# Altium PCB XT short bus ( 5.2 X 4.2 inches).PCBDOC
Units mil, origin at the board's own origin, x right, y up, seen from the top; angles counter-clockwise.
Board outline 5200 x 4200 mil, 10 copper layers (TopLayer, MidLayer1, MidLayer2, MidLayer3, MidLayer4, MidLayer5, MidLayer6, MidLayer7, MidLayer8, BottomLayer); 1 components, 0 nets, 65 pads, 0 vias.
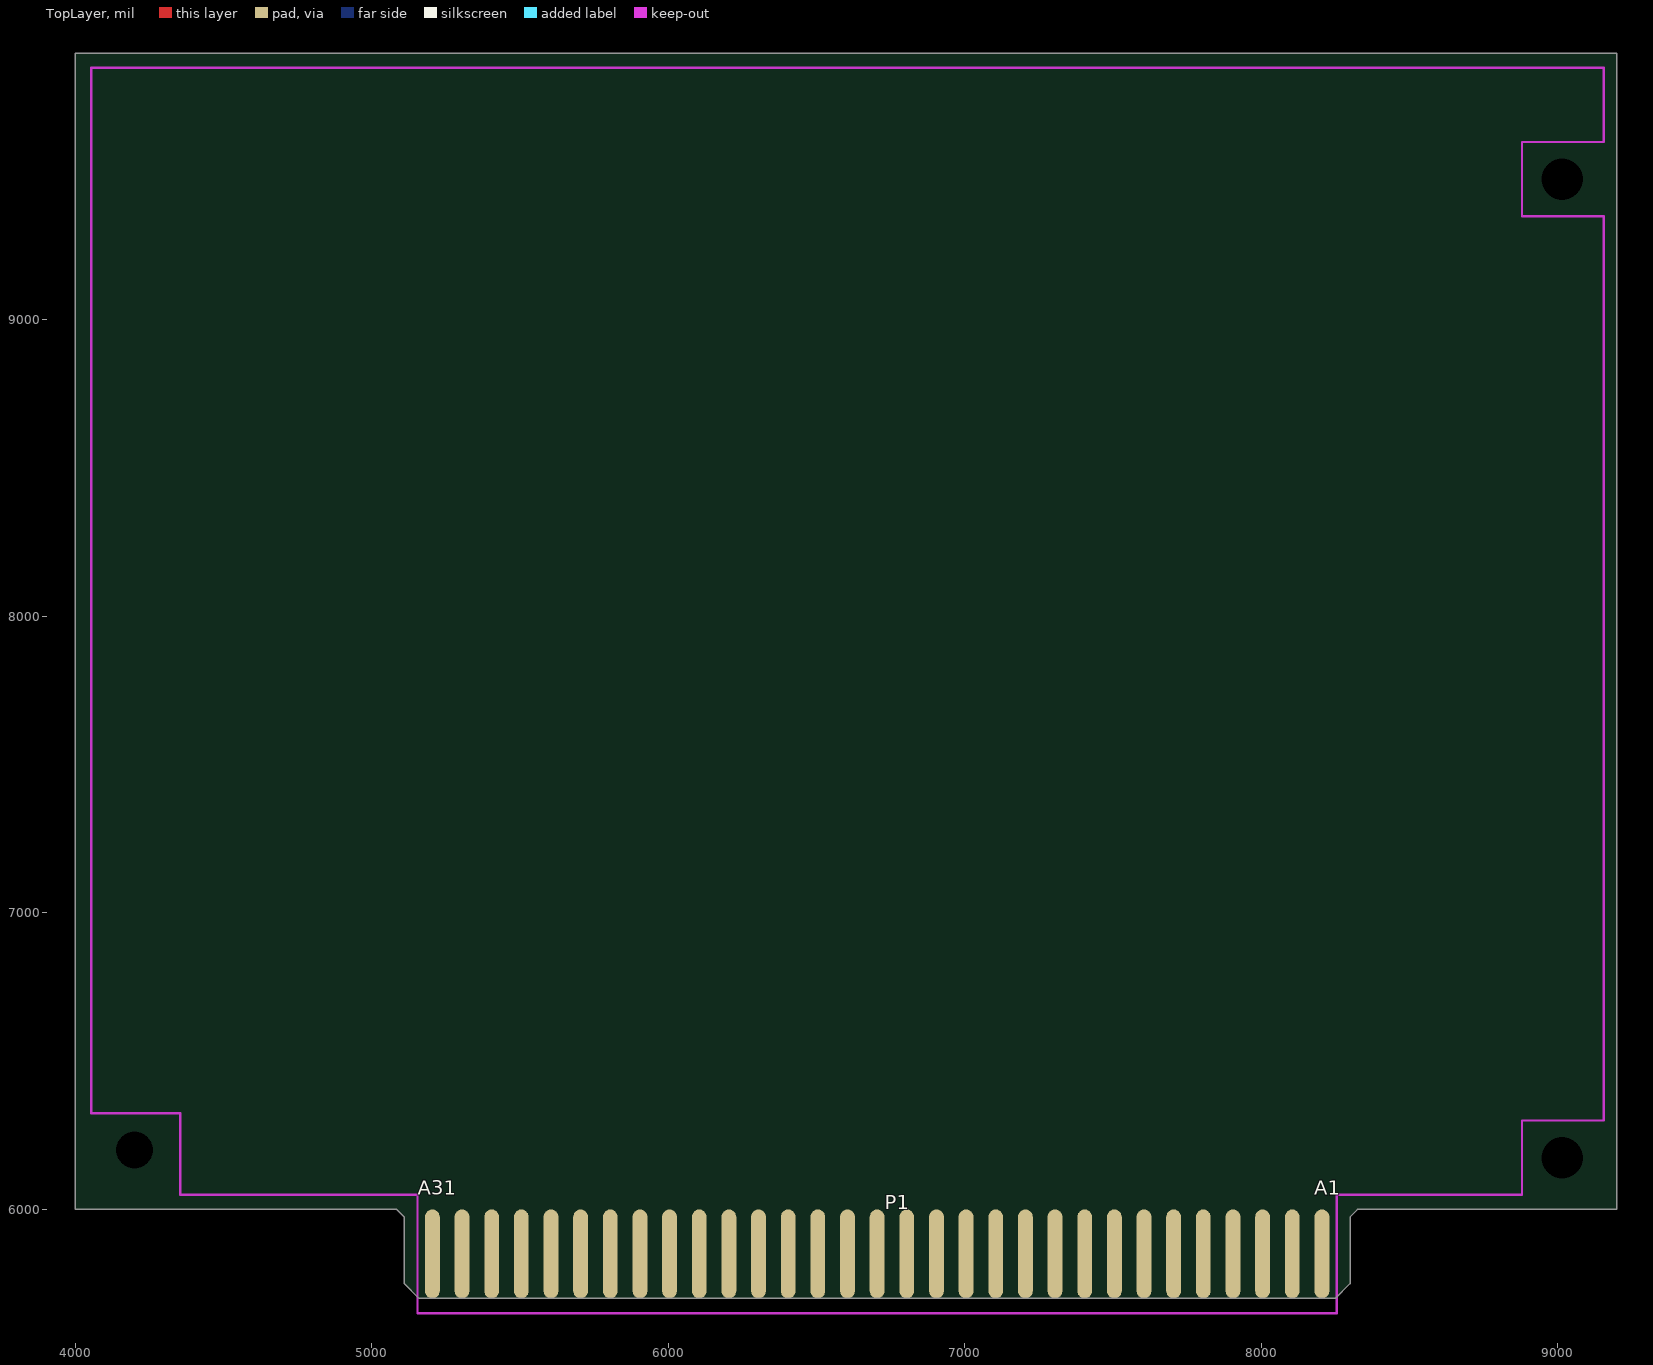
[diagram p0: TopLayer view]
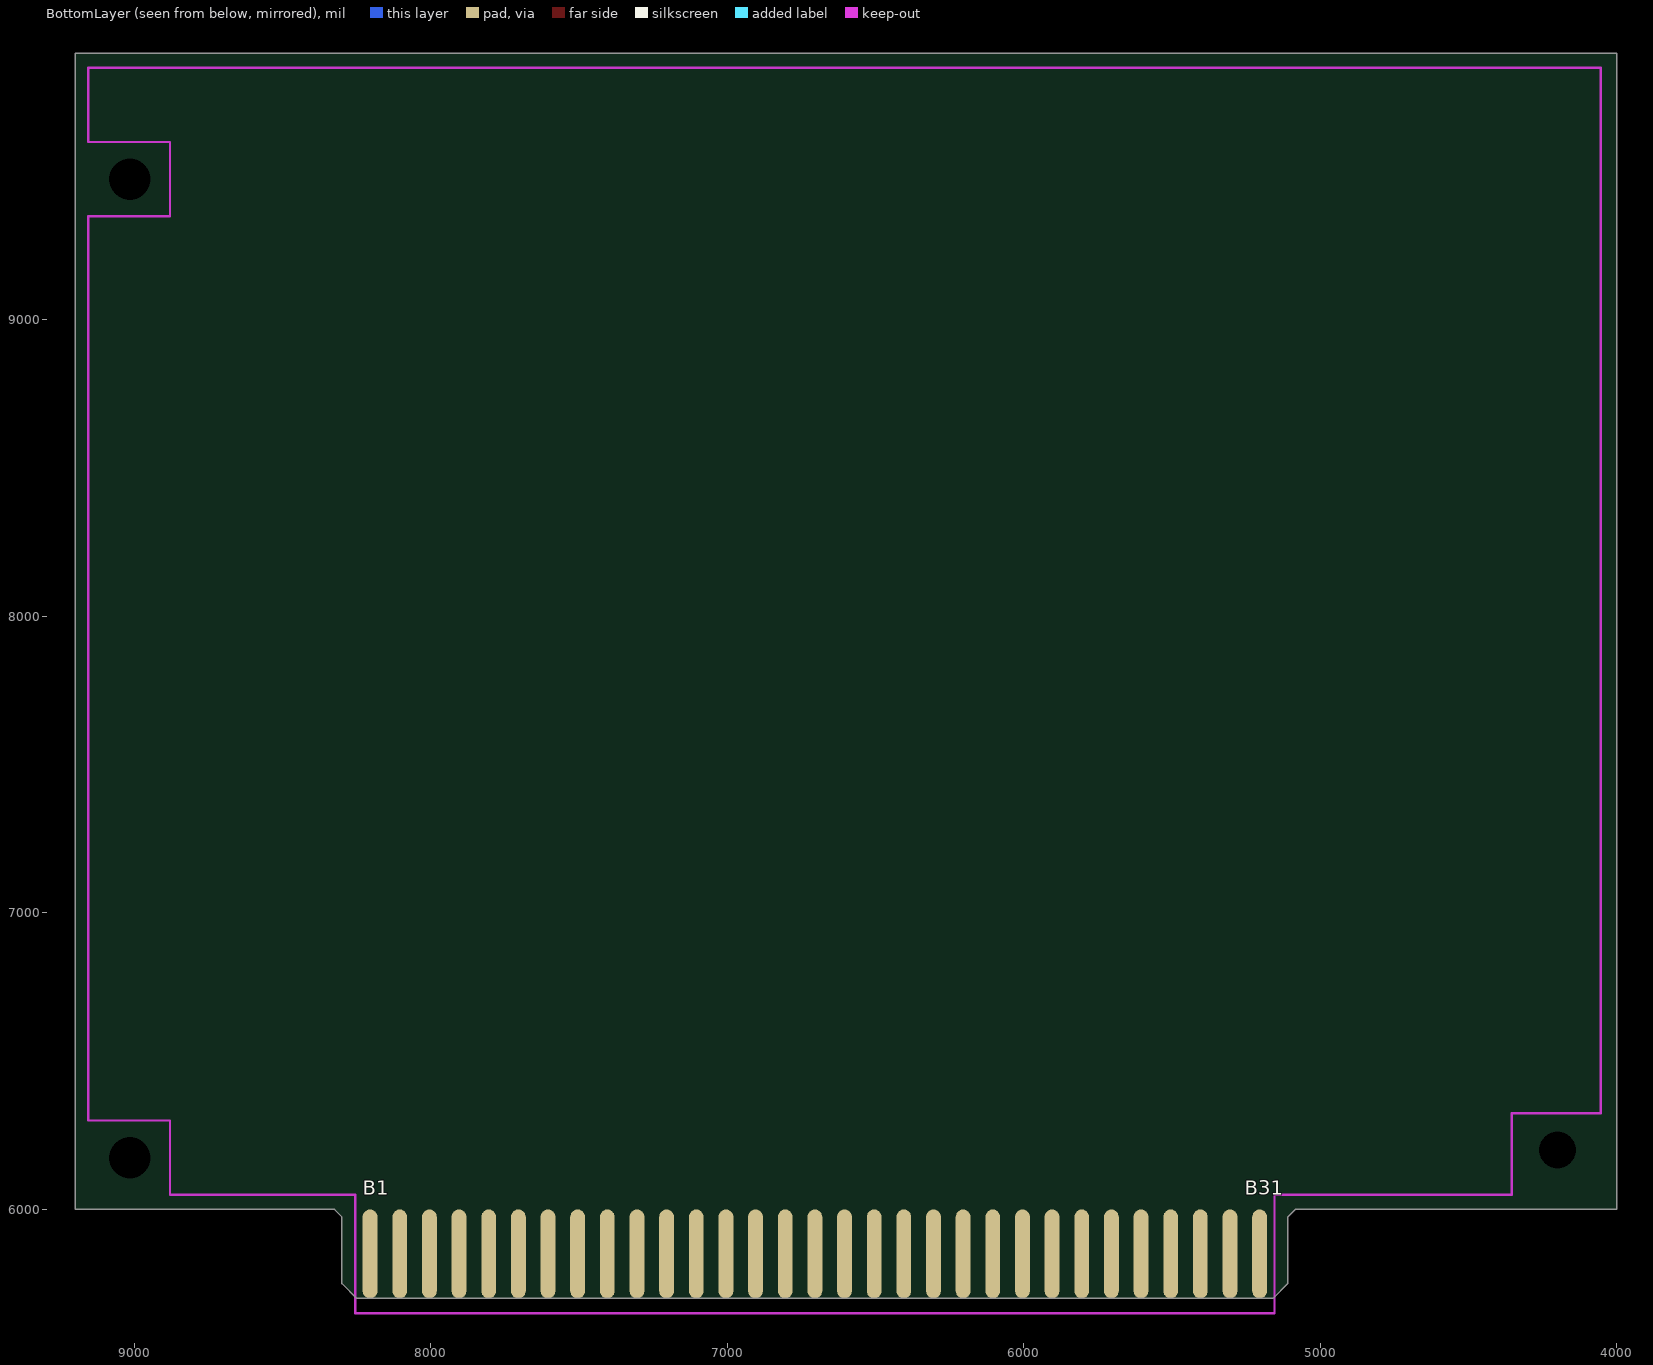
[diagram p1: BottomLayer view, seen from below]
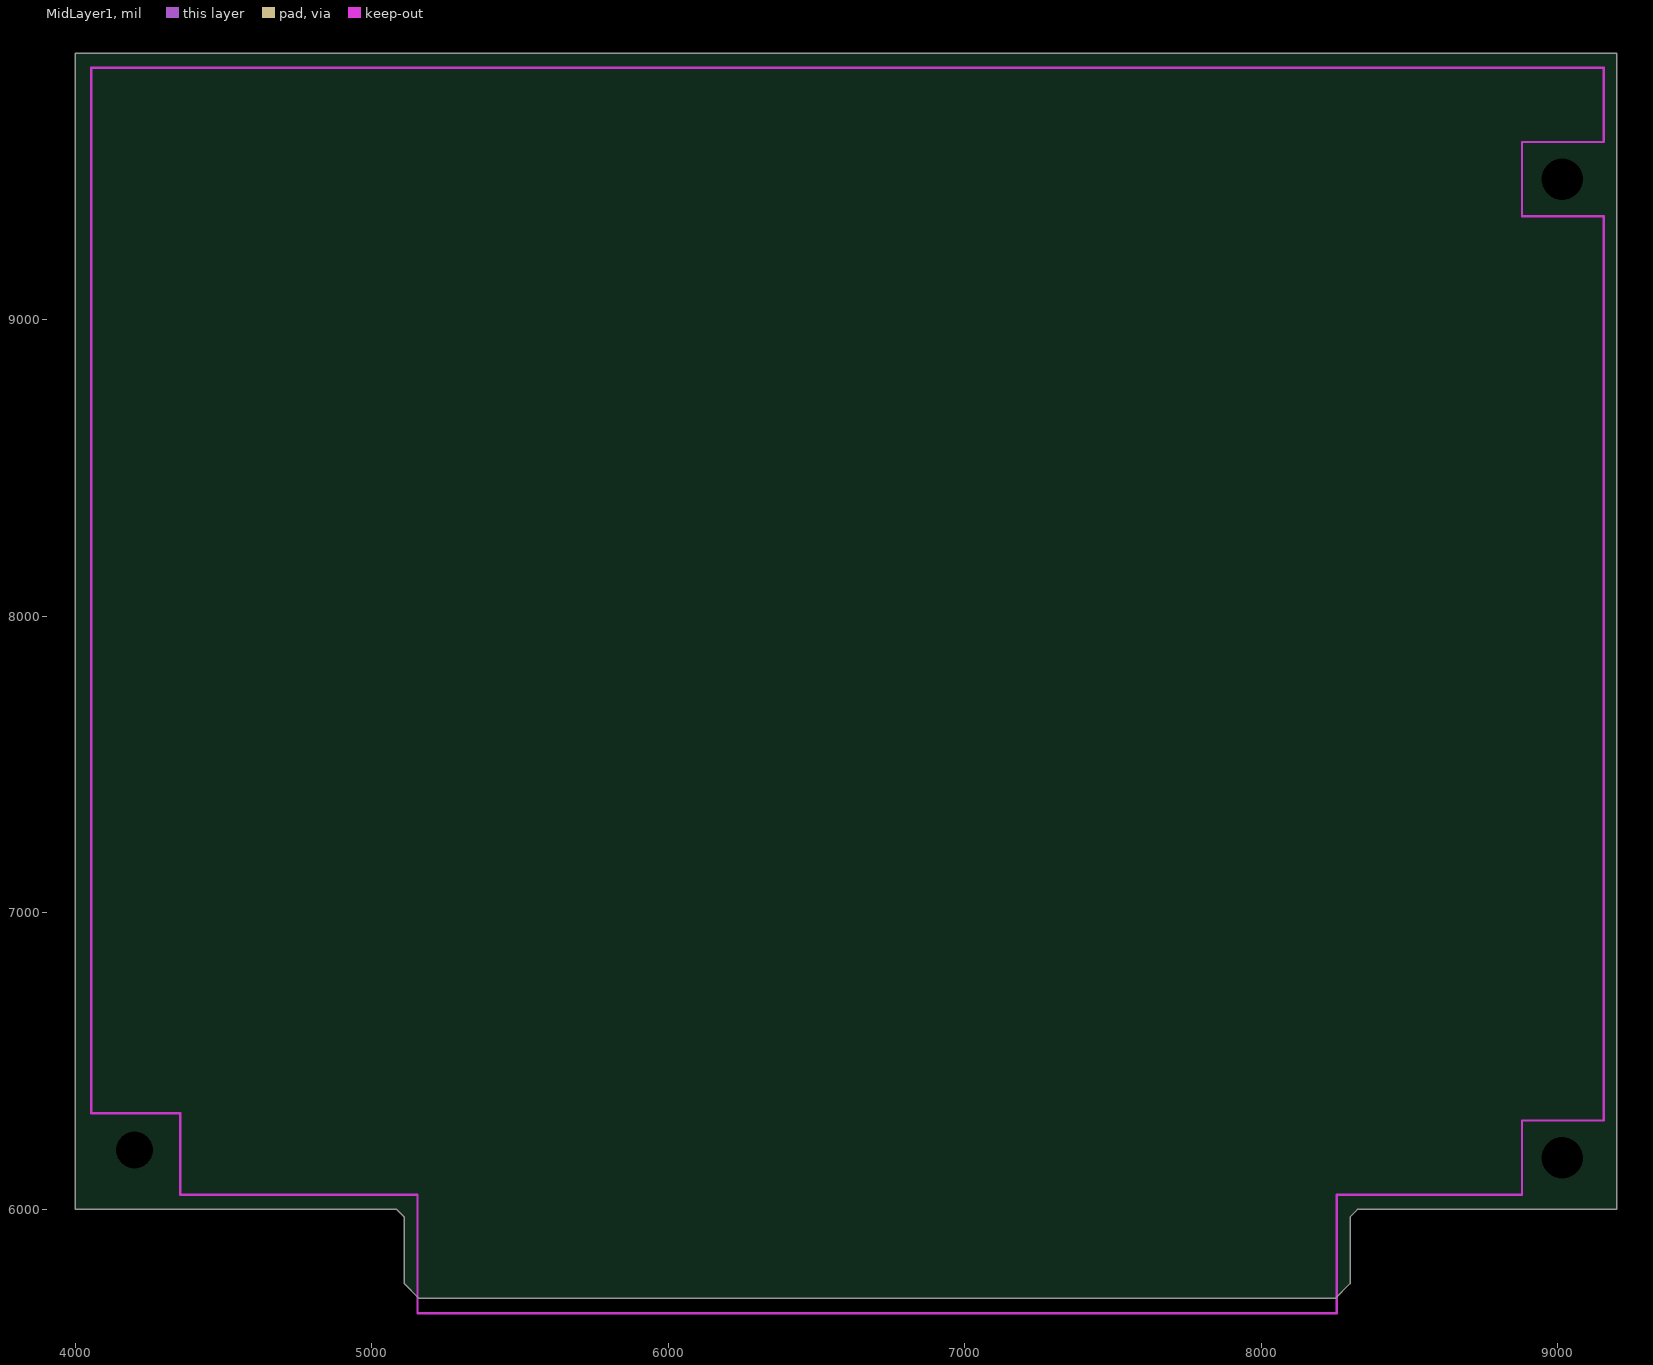
[diagram p2: MidLayer1]
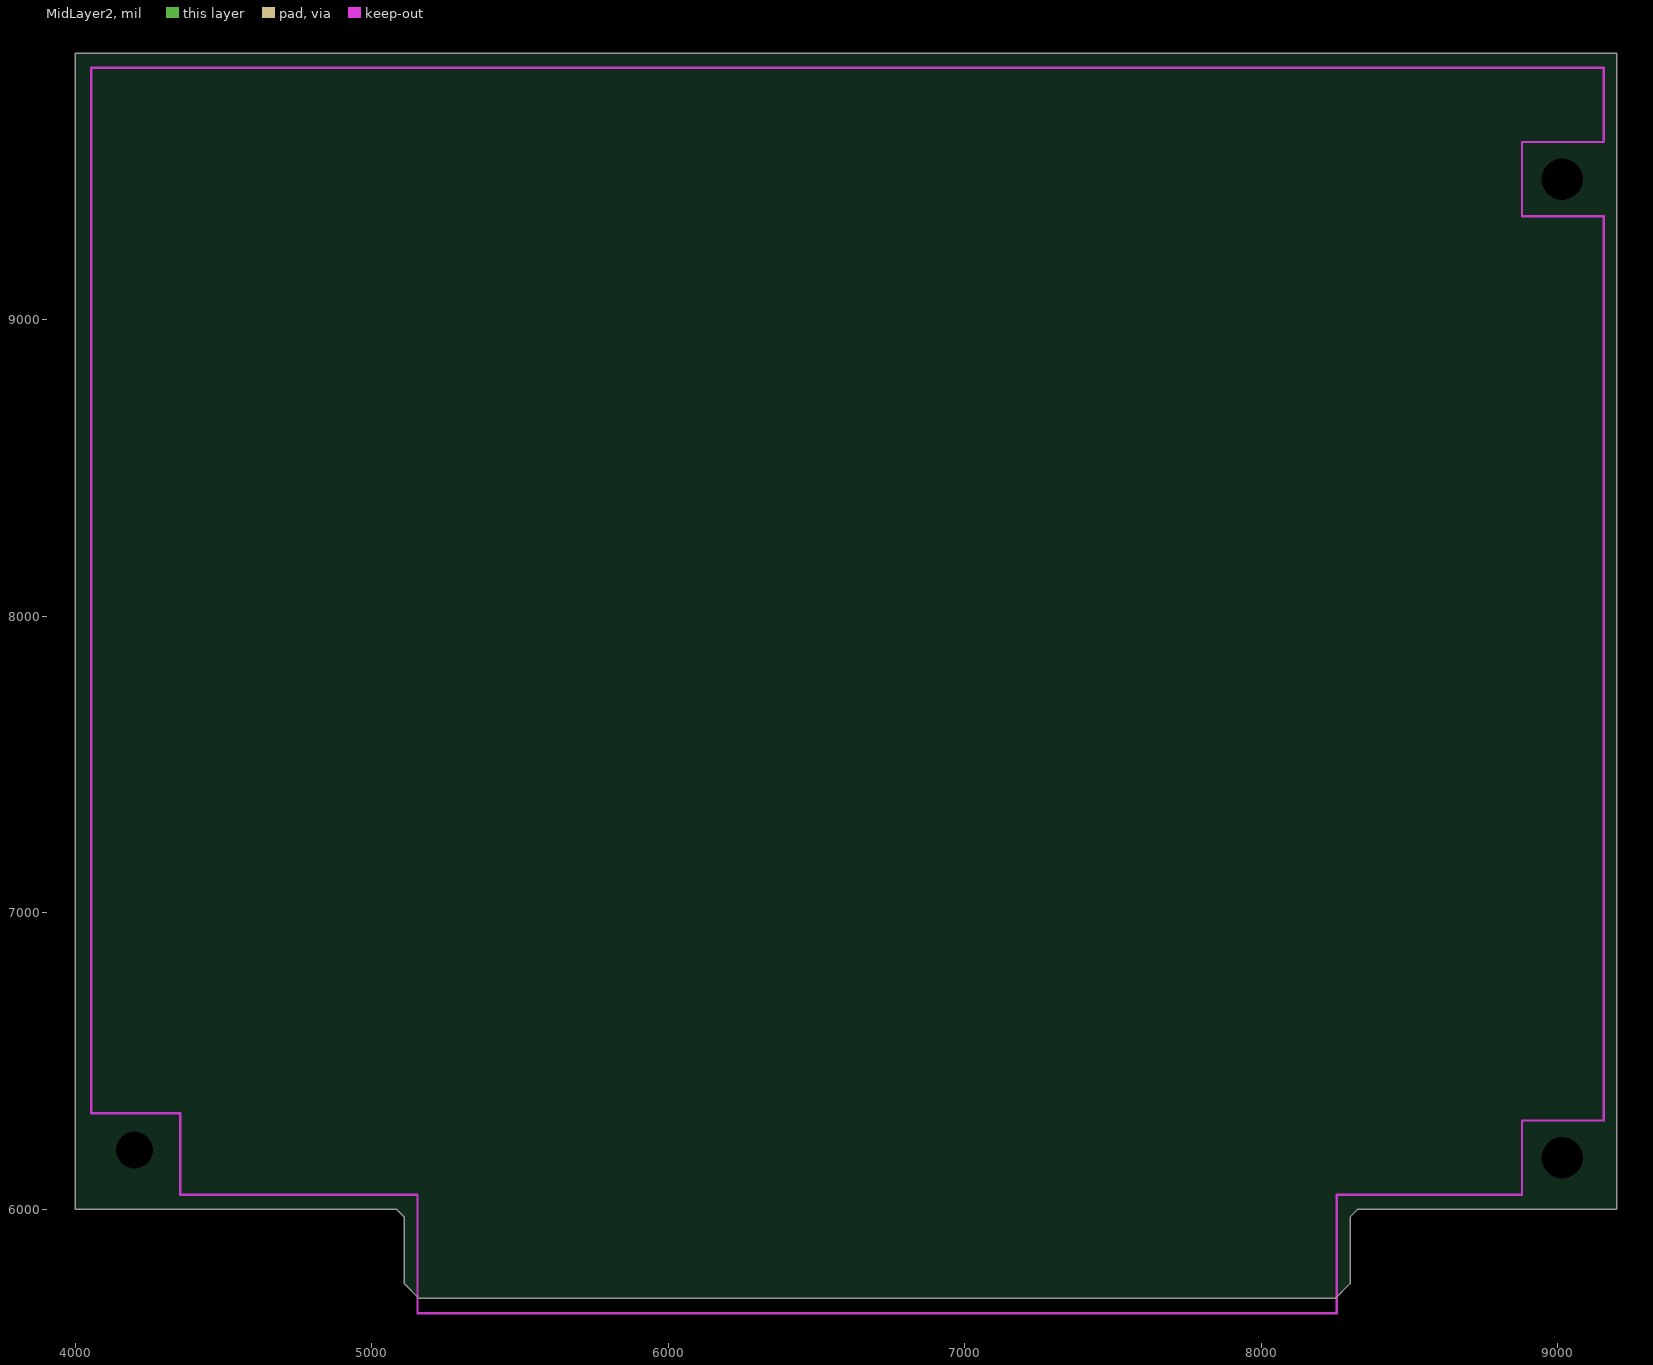
[diagram p3: MidLayer2]
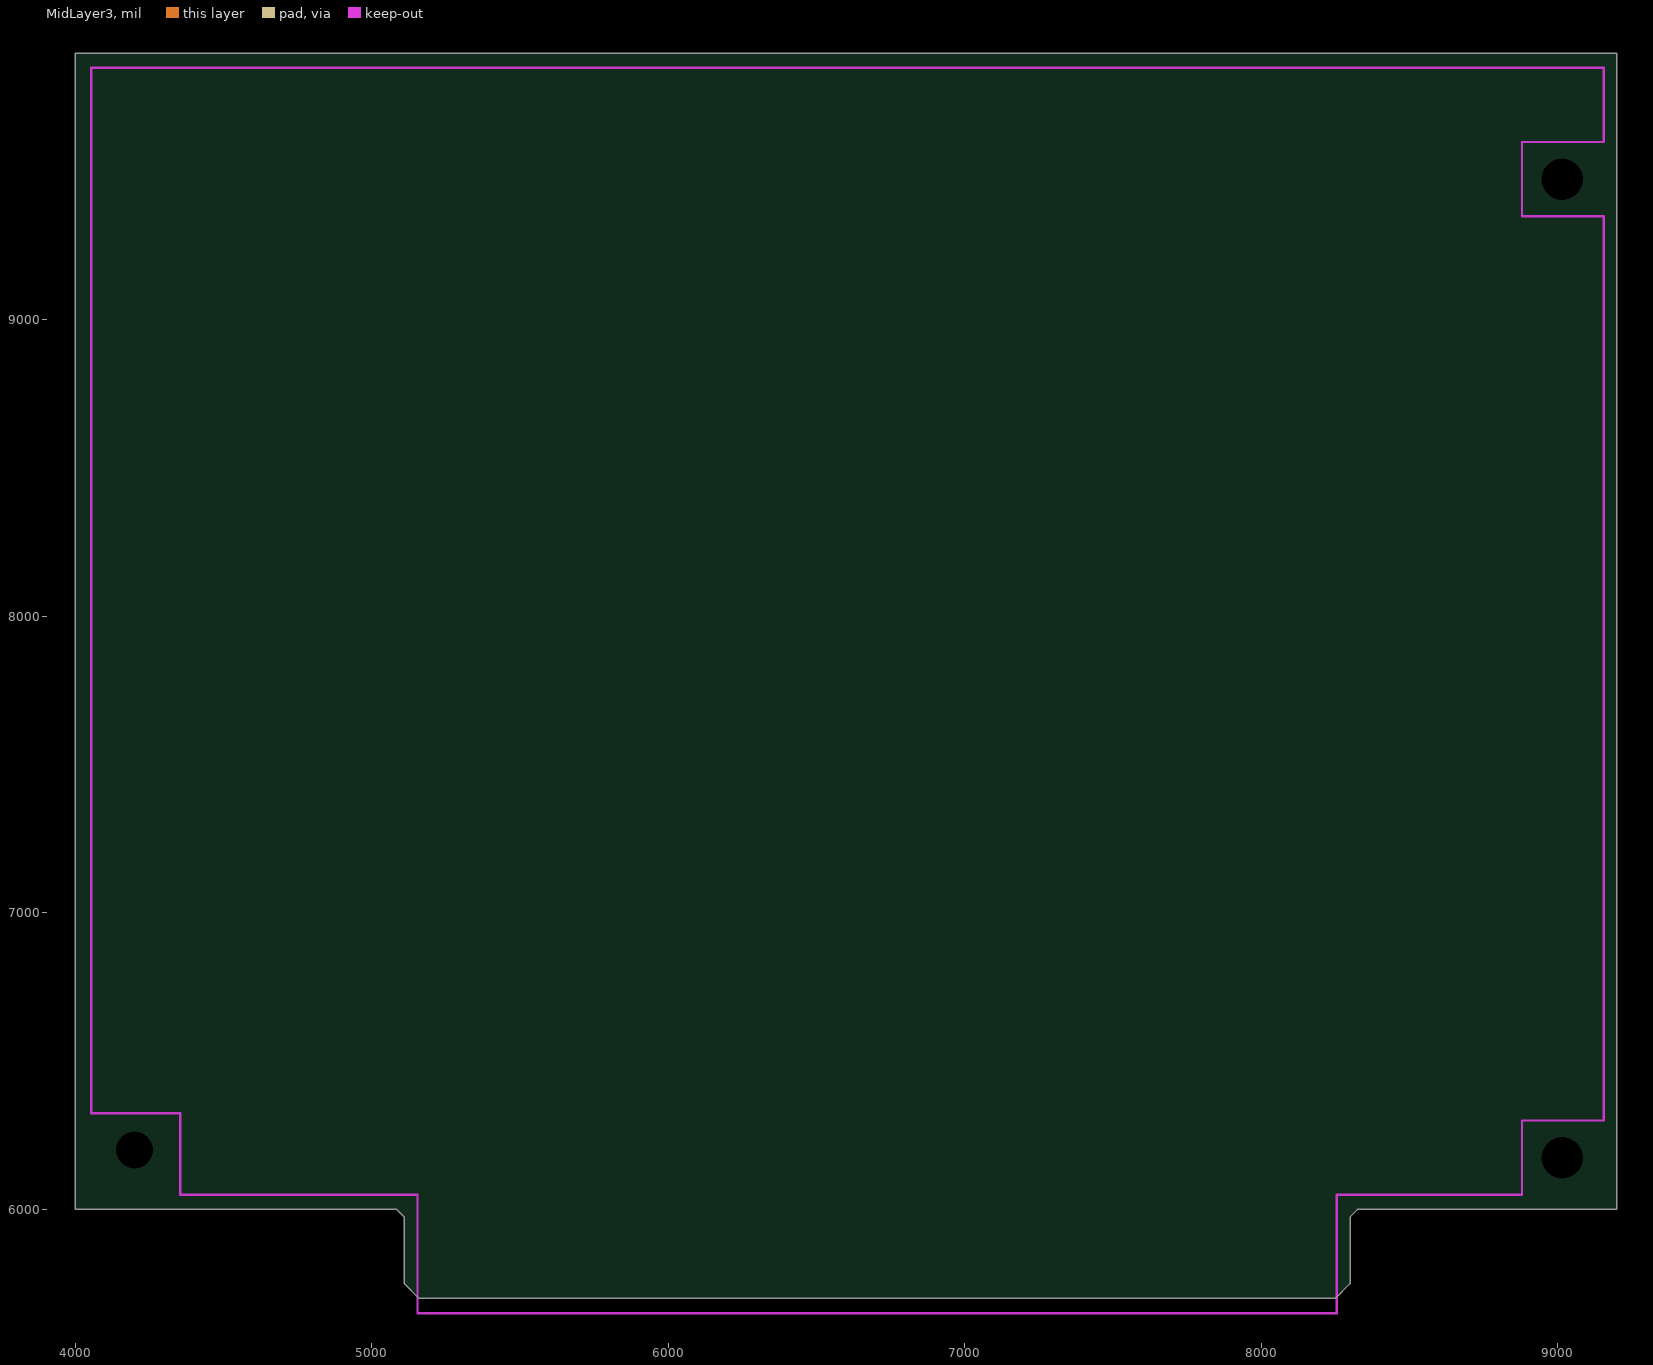
[diagram p4: MidLayer3]
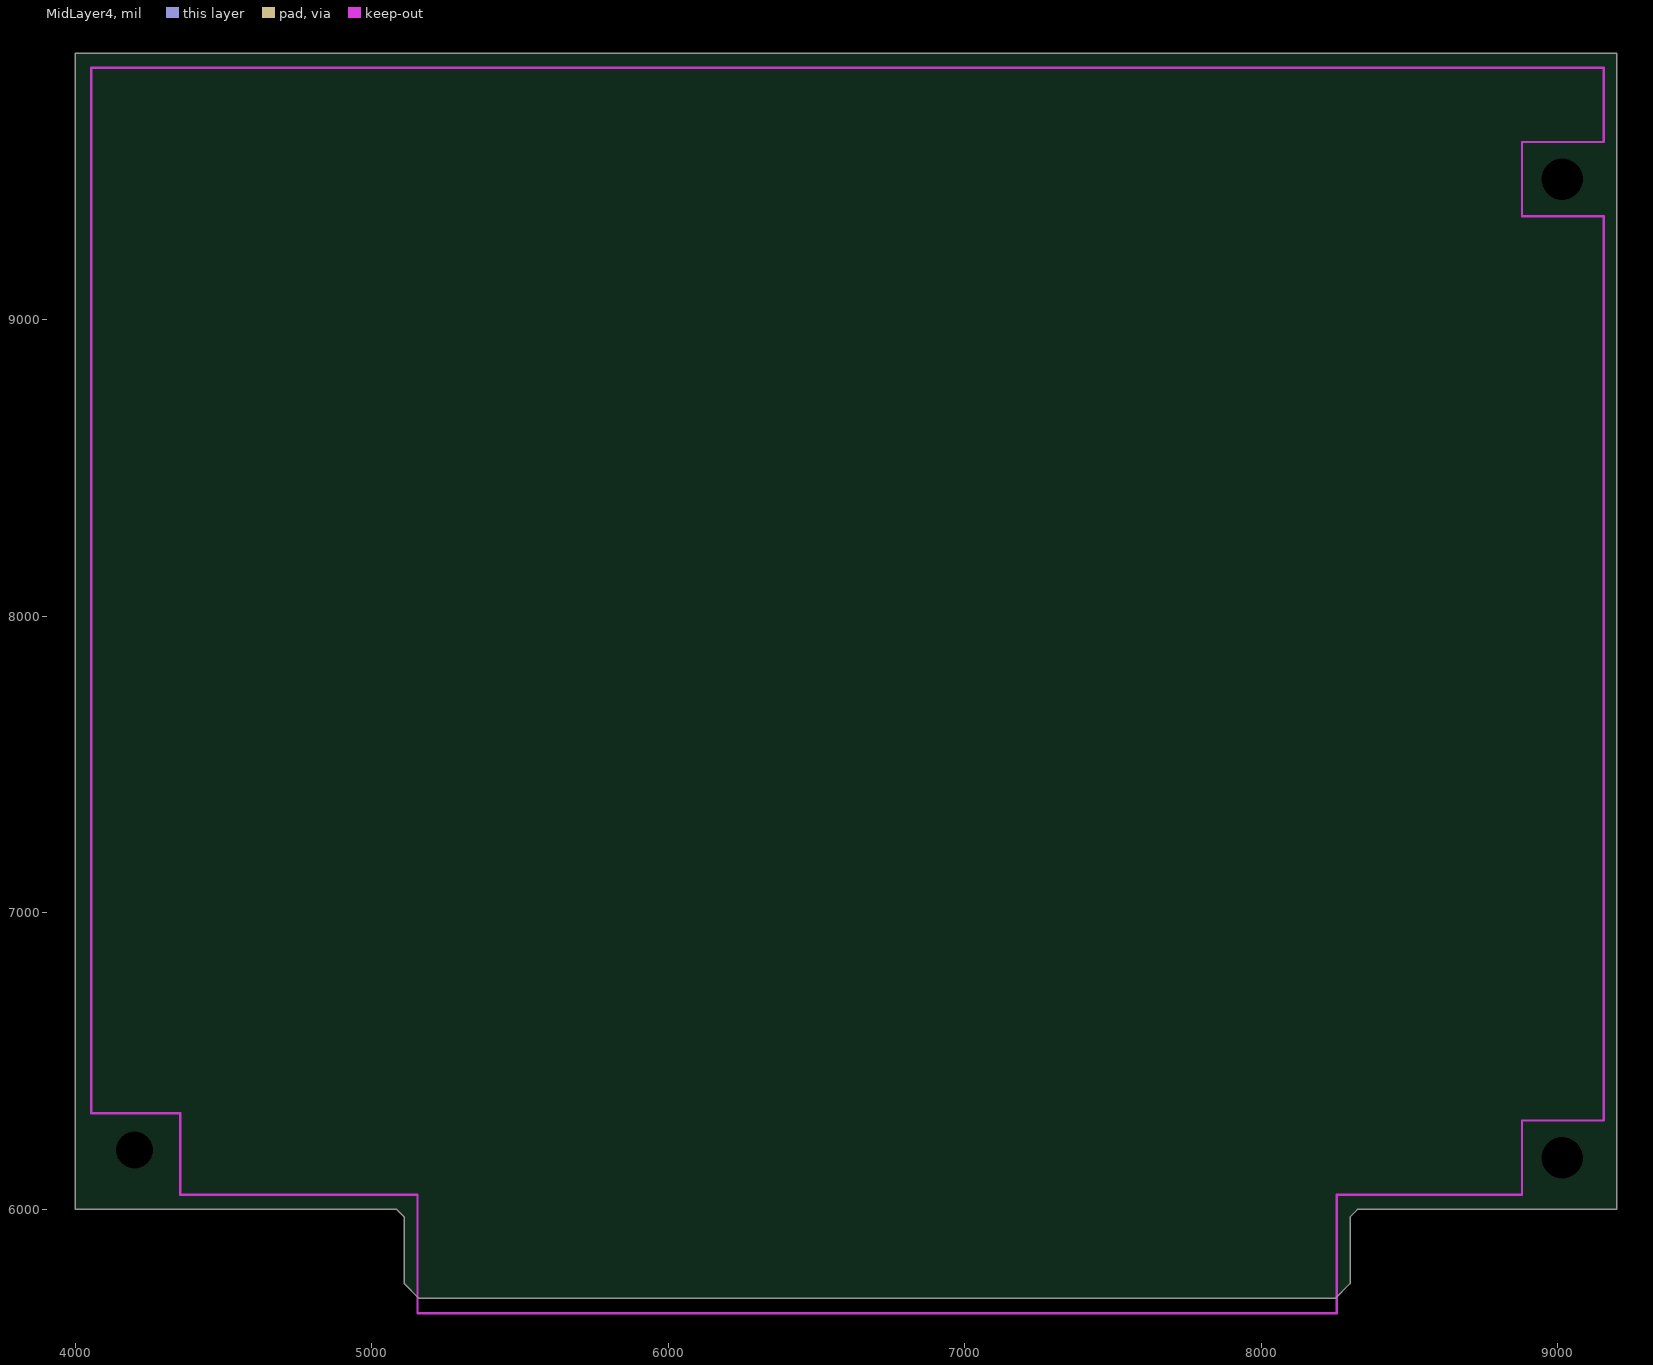
[diagram p5: MidLayer4]
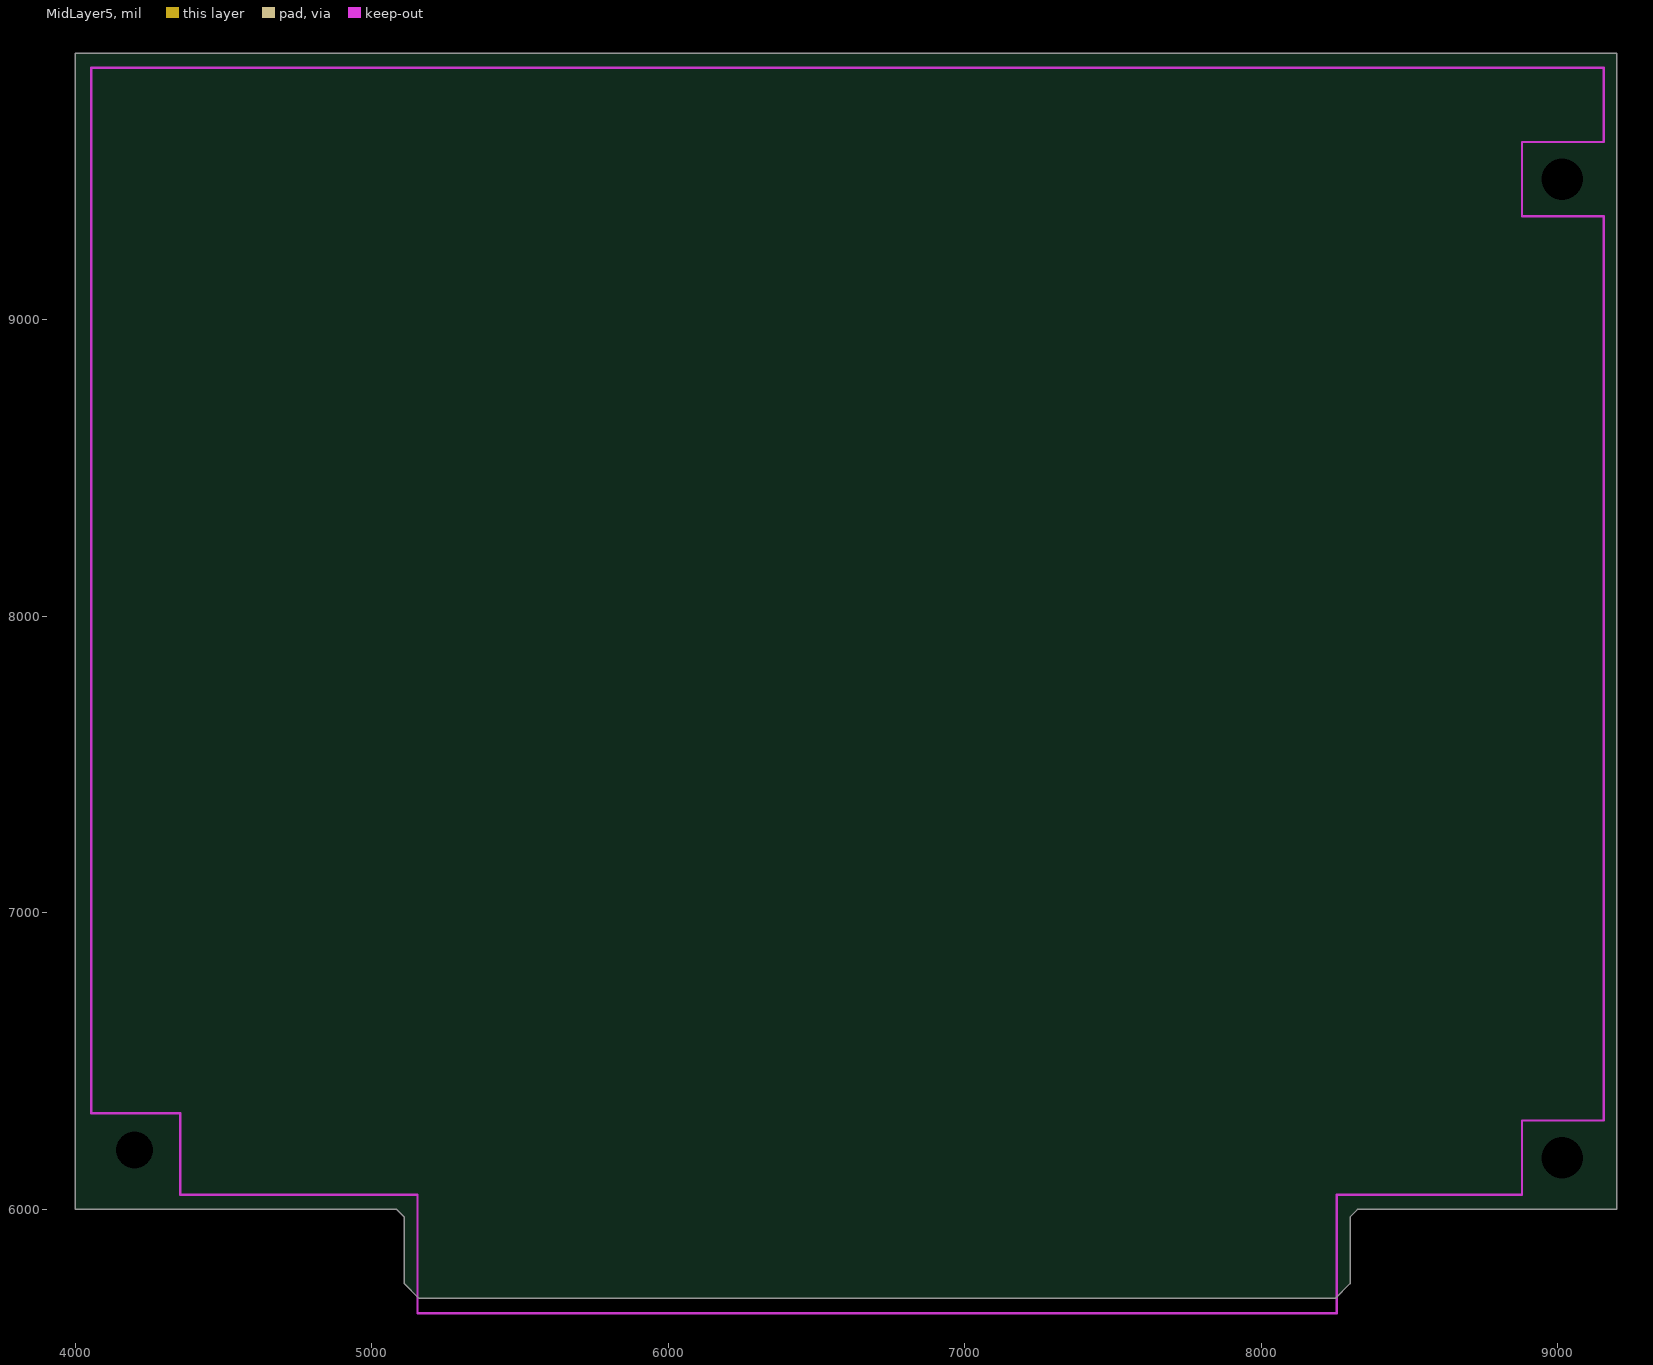
[diagram p6: MidLayer5]
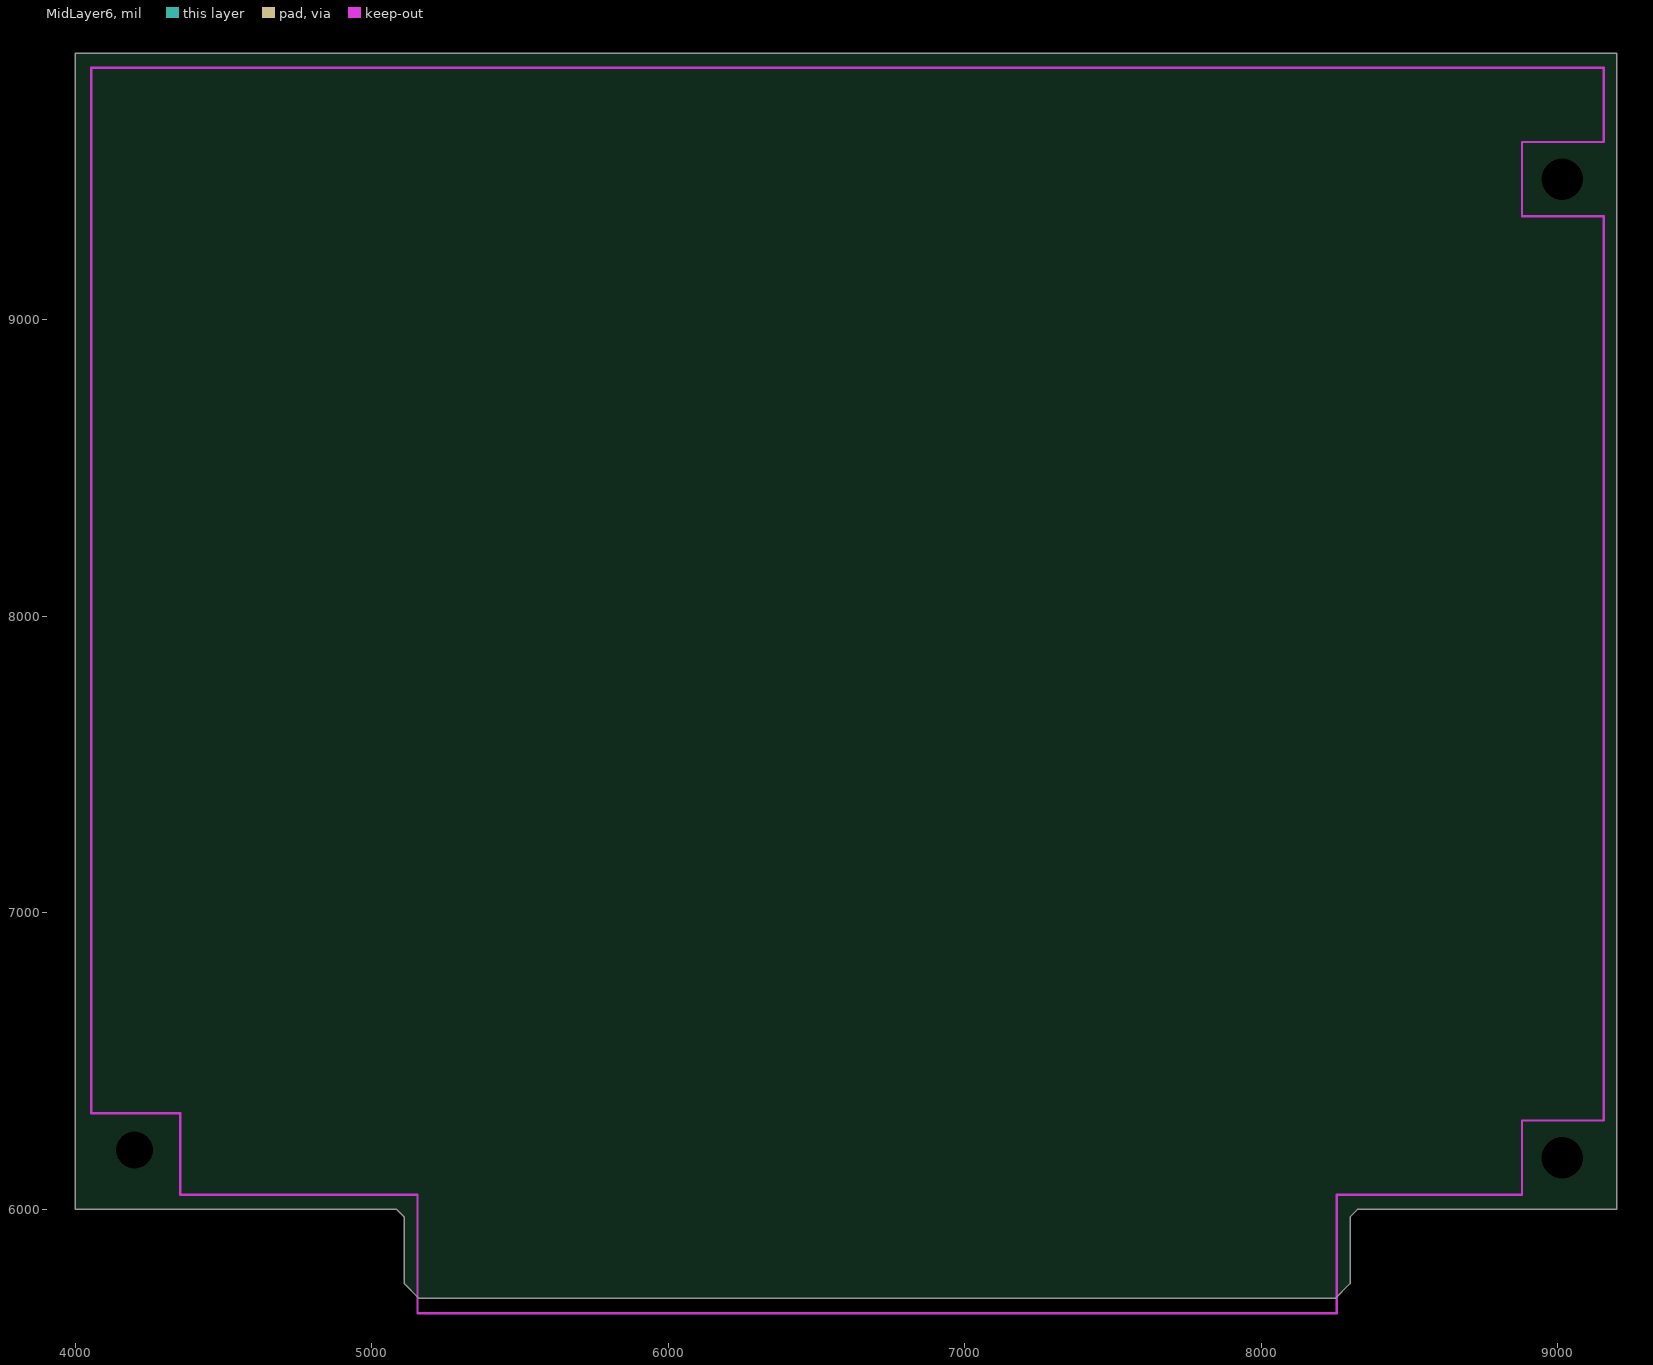
[diagram p7: MidLayer6]
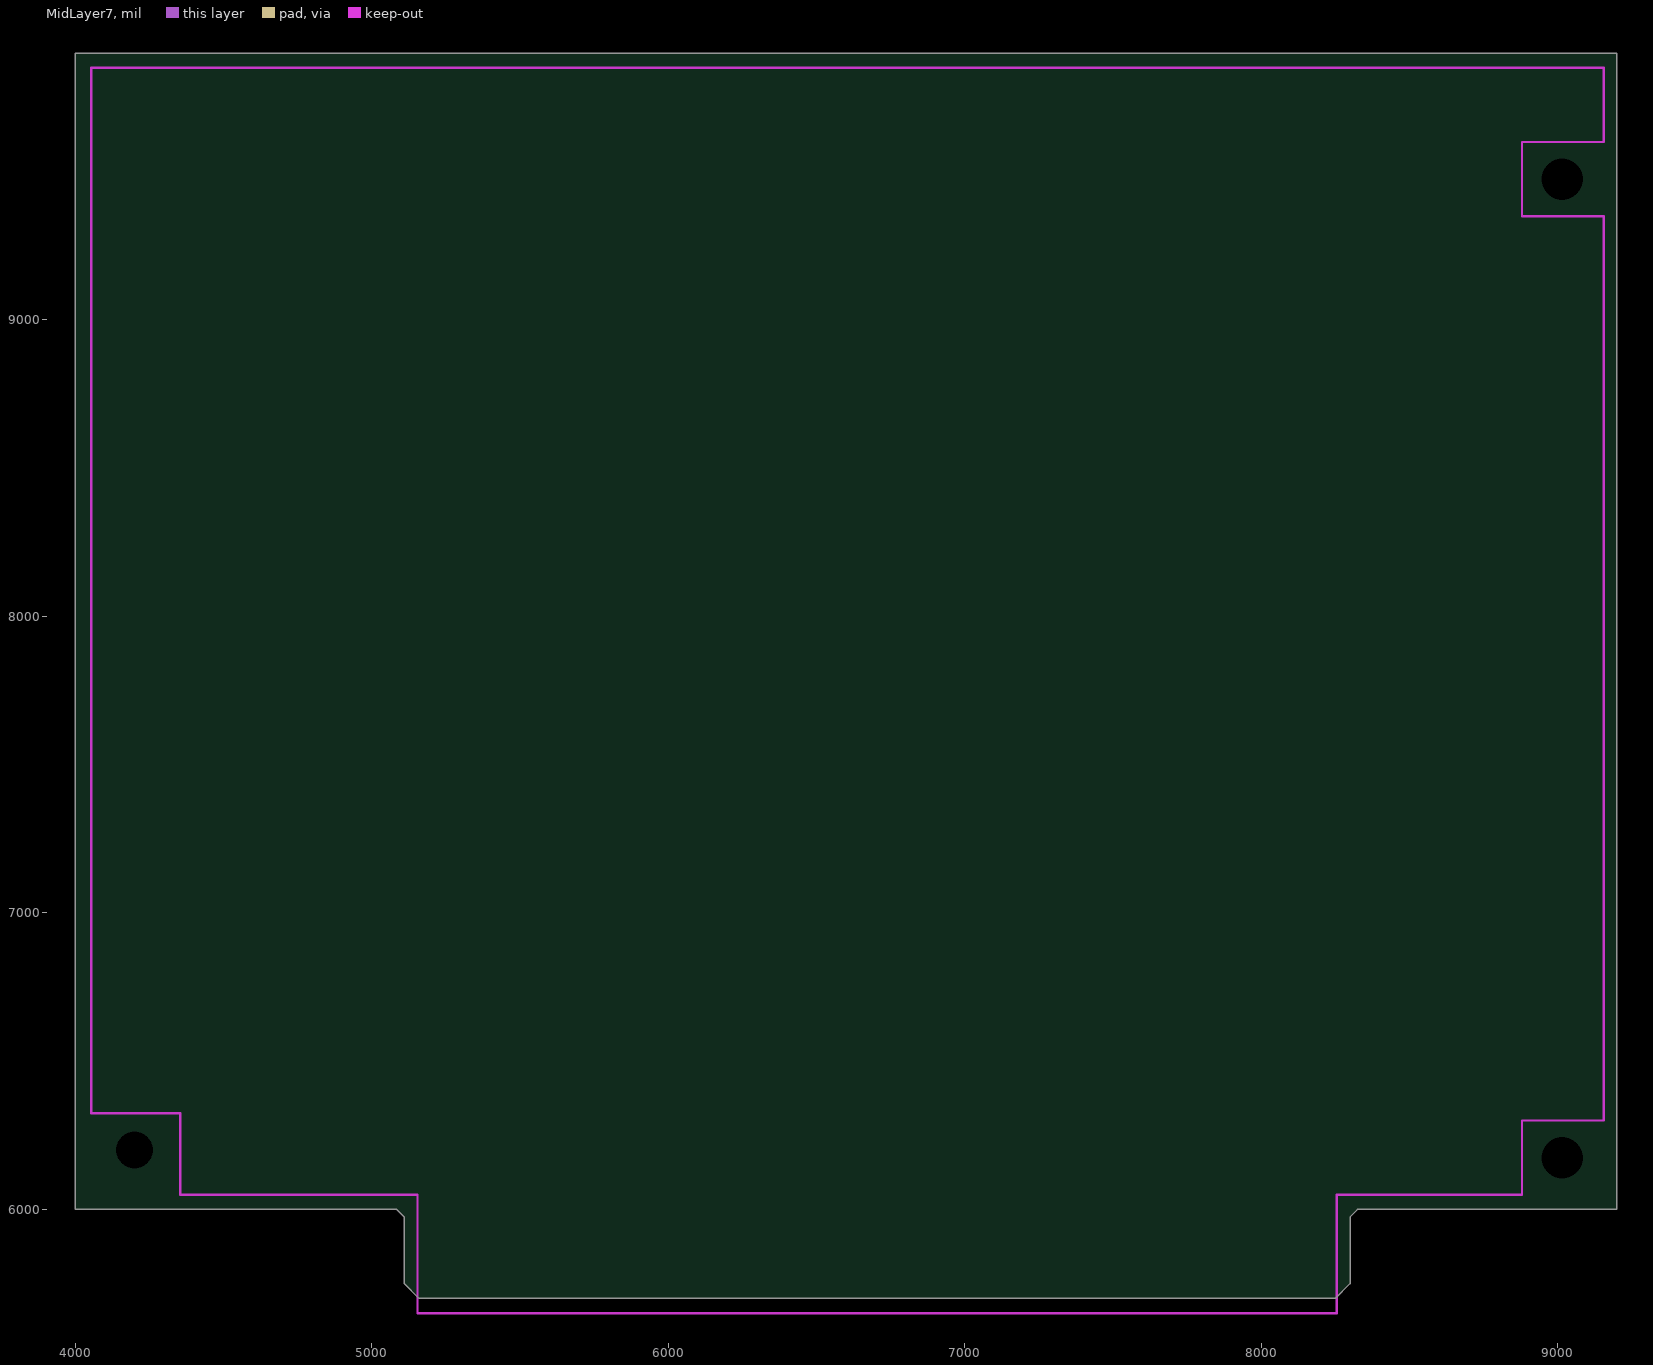
[diagram p8: MidLayer7]
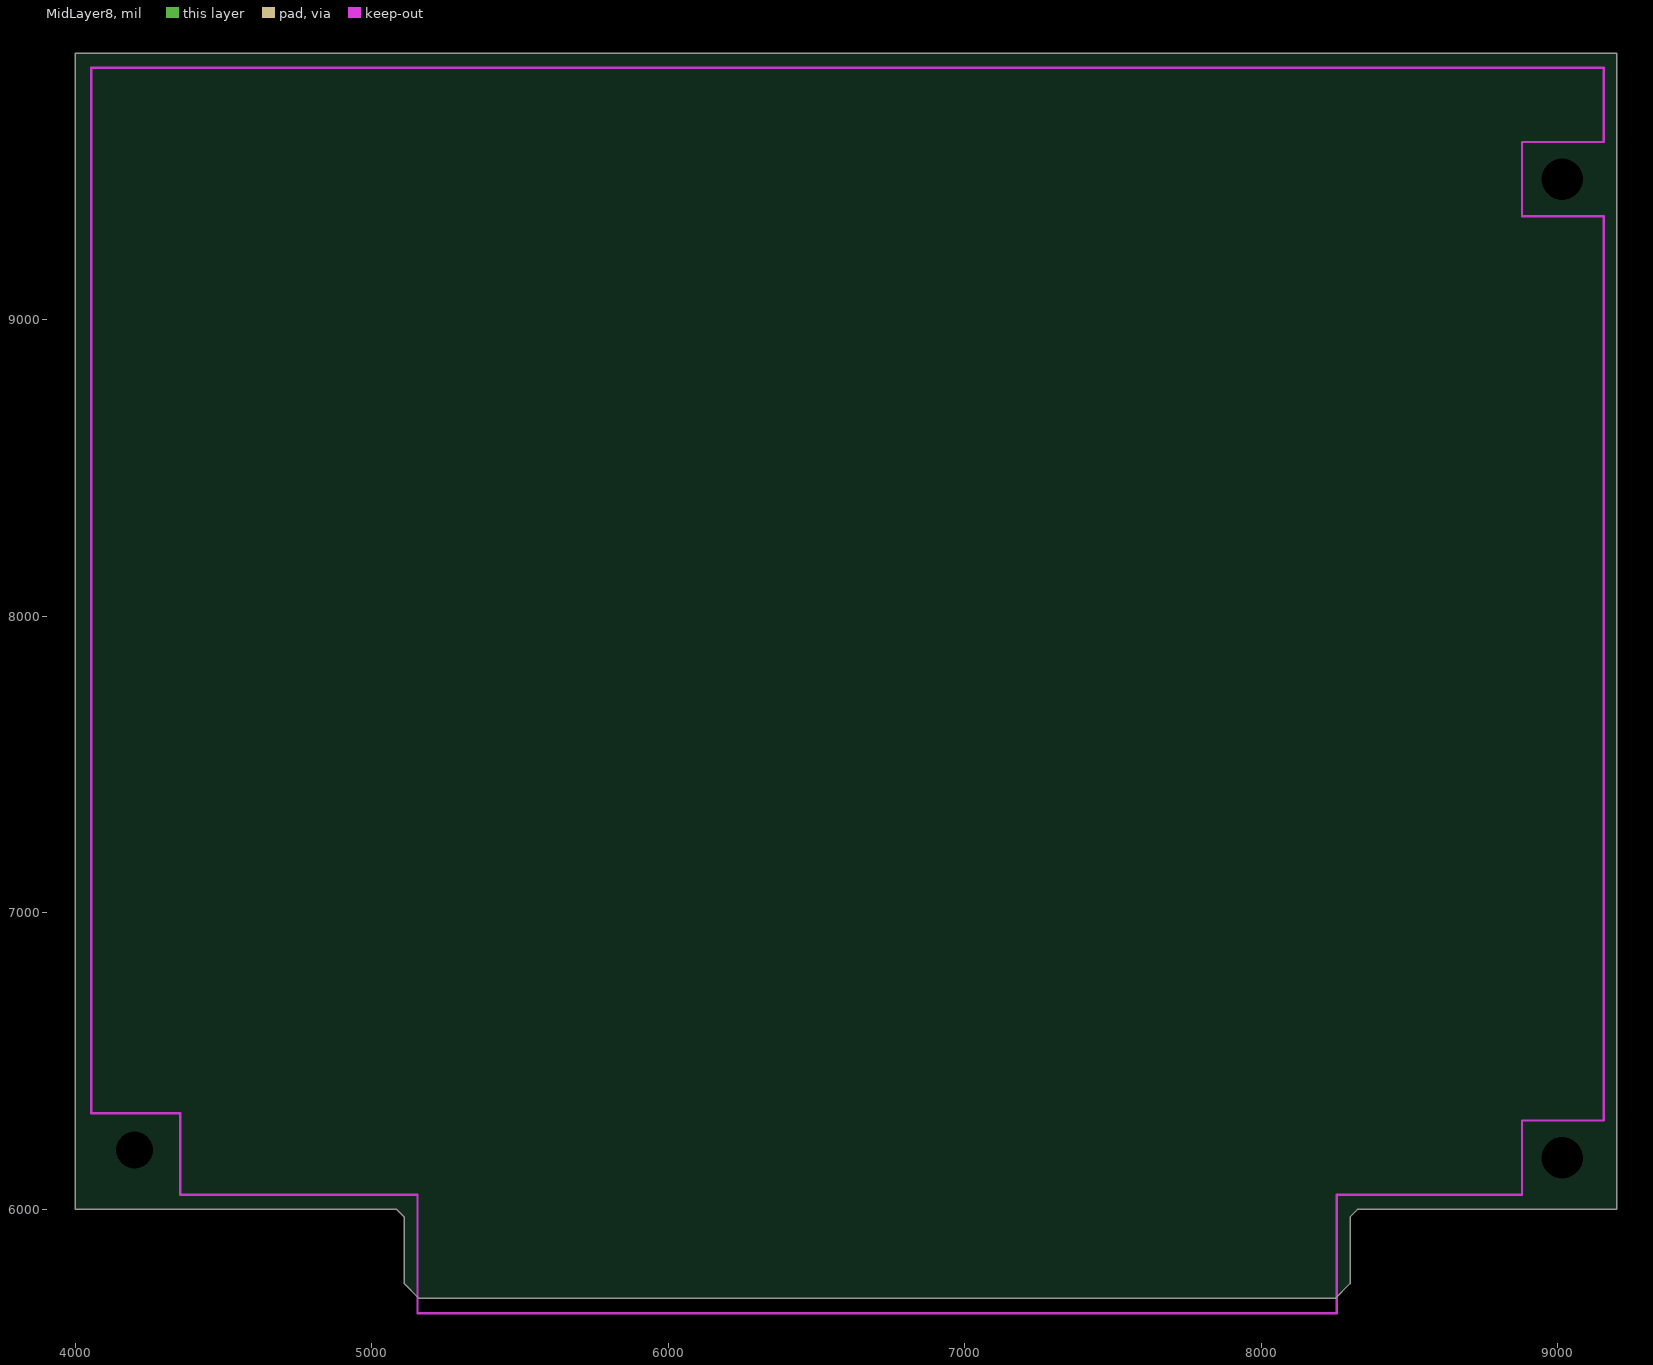
[diagram p9: MidLayer8]

## Layer stack, top to bottom
TopLayer: signal copper 1.4
Dielectric: core 12.6, FR-4, Dk 4.8
MidLayer1: signal copper 1.4
Dielectric: prepreg 12.6, FR-4, Dk 4.8
MidLayer2: signal copper 1.4
Dielectric: core 12.6, FR-4, Dk 4.8
MidLayer3: signal copper 1.4
Dielectric: prepreg 12.6, FR-4, Dk 4.8
MidLayer4: signal copper 1.4
Dielectric: core 12.6, FR-4, Dk 4.8
MidLayer5: signal copper 1.4
Dielectric: prepreg 12.6, FR-4, Dk 4.8
MidLayer6: signal copper 1.4
Dielectric: core 12.6, FR-4, Dk 4.8
MidLayer7: signal copper 1.4
Dielectric: prepreg 12.6, FR-4, Dk 4.8
MidLayer8: signal copper 1.4
Dielectric: core 12.6, FR-4, Dk 4.8
BottomLayer: signal copper 1.4

## Board outline
4000,6000 5085,6000 5110,5975 5110,5750 5160,5700 8250,5700 8300,5750 8300,5975 8325,6000 9200,6000 9200,9900 4000,9900

## Design rules (kind name [scope] priority, off if disabled: settings)
Clearance [All] p1: gap=10
FabricationTestPointUsage TestPointUsage [All] p1: valid=0 allowmultiple=FALSE
FabricationTestpoint Testpoint [All] p1: side=3 testpointundercomponent=TRUE minsize=40 maxsize=100 preferedsize=60 minholesize=20 maxholesize=40 preferedholesize=32 testpointgrid=1 allowsidetop=TRUE allowsidebottom=TRUE usegrid=TRUE gridtolerance=0.01
PasteMaskExpansion PasteMaskExpansion_1 [InComponent('P1')] p1: expansion=-150
PasteMaskExpansion [All] p2: expansion=0
PlaneClearance [All] p1: clearance=10
PolygonConnect [All] p1: connectstyle=Relief reliefconductorwidth=10 reliefentries=4 polygonreliefangle="90 Angle"
RoutingVias [All] p1: holewidth=28 width=50 viastyle="Through Hole" minholewidth=28 minwidth=50 maxholewidth=28 maxwidth=50
SilkscreenOverComponentPads [All] p1: minsilkscreentomaskgap=10
SolderMaskExpansion [All] p1: expansion=2
Width [All] p1: maxlimit=10 minlimit=10 preferedwidth=10
23 further rules are at their usual default settings.

## Components (designator, comment, footprint, x,y, rotation, side; value= is the part's Value field where it differs from the comment)
P1 "ECN-IBMXT" ECN-IBMXT 8205,5850 r0 top locked

## Footprints (in the part's own frame and the unit in brackets; to place one, negate y for a bottom-side part, rotate by r counter-clockwise, add the part's x,y. Pads: shape width x height; smd on the part's side, far side on the other; paste and mask are expansions set on the pad)
ECN-IBMXT [mil]
  oval 50x300 smd: A1(0,0) A2(-100,0) A3(-200,0) A4(-300,0) A5(-400,0) A6(-500,0) A7(-600,0) A8(-700,0) A9(-800,0) A10(-900,0) A11(-1000,0) A12(-1100,0) A13(-1200,0) A14(-1300,0) A15(-1400,0) A16(-1500,0) A17(-1600,0) A18(-1700,0) A19(-1800,0) A20(-1900,0) A21(-2000,0) A22(-2100,0) A23(-2200,0) A24(-2300,0) A25(-2400,0) A26(-2500,0) A27(-2600,0) A28(-2700,0) A29(-2800,0) A30(-2900,0) A31(-3000,0)
  oval 50x300 smd far side: B1(0,0) B2(-100,0) B3(-200,0) B4(-300,0) B5(-400,0) B6(-500,0) B7(-600,0) B8(-700,0) B9(-800,0) B10(-900,0) B11(-1000,0) B12(-1100,0) B13(-1200,0) B14(-1300,0) B15(-1400,0) B16(-1500,0) B17(-1600,0) B18(-1700,0) B19(-1800,0) B20(-1900,0) B21(-2000,0) B22(-2100,0) B23(-2200,0) B24(-2300,0) B25(-2400,0) B26(-2500,0) B27(-2600,0) B28(-2700,0) B29(-2800,0) B30(-2900,0) B31(-3000,0)

## Free pads (board coordinates)
  round 50 hole 140: 1(9015,6175) 2(9015,9475)
  round 50 hole 125: 3(4200,6200)

## Nets (pads, with @x,y where several pads share a name; then routed paths per layer and width w, separated by ;. In a path a pad name is that pad's centre, name@x,y a point inside that pad or via, vN(x,y) a via of type N, cw(c..) or ccw(c..) an arc to the next point about the centre after c; other vN are vias at no path point)
pads on no net: P1.A1 P1.A2 P1.A3 P1.A4 P1.A5 P1.A6 P1.A7 P1.A8 P1.A9 P1.A10 P1.A11 P1.A12 P1.A13 P1.A14 P1.A15 P1.A16 P1.A17 P1.A18 P1.A19 P1.A20 P1.A21 P1.A22 P1.A23 P1.A24 P1.A25 P1.A26 P1.A27 P1.A28 P1.A29 P1.A30 P1.A31 P1.B1 P1.B2 P1.B3 P1.B4 P1.B5 P1.B6 P1.B7 P1.B8 P1.B9 P1.B10 P1.B11 P1.B12 P1.B13 P1.B14 P1.B15 P1.B16 P1.B17 P1.B18 P1.B19 P1.B20 P1.B21 P1.B22 P1.B23 P1.B24 P1.B25 P1.B26 P1.B27 P1.B28 P1.B29 P1.B30 P1.B31

## Keep-outs
KeepOutLayer:
  lines w8: 4055,6325 4055,9850 9155,9850 9155,9600 8880,9600 8880,9350 9155,9350 9155,6300 8880,6300 8880,6050 8255,6050 8255,5650 5155,5650 5155,6050 4355,6050 4355,6325 4055,6325

## Other copper
TopLayer:
  text ".GTL" at 8920,10020 h90
MidLayer1:
  text ".G1" at 8920,10020 h90
MidLayer2:
  text ".G2" at 8920,10020 h90
MidLayer3:
  text ".G3" at 8920,10020 h90
MidLayer4:
  text ".G4" at 8920,10020 h90
MidLayer5:
  text ".G5" at 8920,10020 h90
MidLayer6:
  text ".G6" at 8920,10020 h90
MidLayer7:
  text ".G7" at 8920,10020 h90
MidLayer8:
  text ".G8" at 8920,10020 h90
BottomLayer:
  text "P/N XXXXXX-XXX REV A" at 5320,10100 h75
  text ".GBL" at 8920,10020 h90

## Silkscreen, mask and mechanical layers (free items; w line width, h text height)
TopOverlay:
  rectangle: 4281,10303 5031,10503
  rectangle: 4281,10593 5031,10793
  lines w10: 5392.59,10695.97 ccw(c5441,10735.5) 5392.71,10695.83 ; 9301.59,4622.97 ccw(c9350,4662.5) 9301.71,4622.83
  text "C" at 5496,10698 h60
  text "2002 COMPANY NAME" at 5646,10698 h75
  text "S/N" at 4031,10650.5 h75
  text "BOARD NAME" at 5496,10523 h75
  text "ASSY NO.: XXXXXX" at 5496,10373 h75
  text "REV" at 4031,10353 h75
  text ".GTO" at 8920,10020 h90
TopPaste:
  text ".GTP" at 8920,10020 h90
BottomPaste:
  text ".GBP" at 8920,10020 h90
TopSolder:
  rectangle: 5080,5650 8330,6025
  text ".GTS" at 8920,10020 h90
BottomSolder:
  rectangle: 5080,5650 8330,6025
  text ".GBS" at 8920,10020 h90
Mechanical1:
  the board outline again, w20
Mechanical3:
  lines w10: 8890,6125 8890,6075 8940,6075 ; 8890,6150 8890,6200 ; 8890,6225 8890,6275 8940,6275 ; 8890,9425 8890,9375 8940,9375 ; 8890,9450 8890,9500 ; 8890,9525 8890,9575 8940,9575 ; 8965,6075 9015,6075 ; 8965,6275 9015,6275 ; 8965,9375 9015,9375 ; 8965,9575 9015,9575 ; 9040,6075 9090,6075 ; 9040,6275 9090,6275 ; 9040,9375 9090,9375 ; 9040,9575 9090,9575 ; 9115,6075 9165,6075 ; 9115,6275 9165,6275 ; 9115,9375 9165,9375 ; 9115,9575 9165,9575 ; 9200,6075 9240,6075 9240,4925 9265,4925 9265,9650 9690,9650 9690,9675 9240,9675 9240,9575 9200,9575 ; 9200,6275 9240,6275 9240,9375 9200,9375
Mechanical4:
  circle w10: c5145.67,5719.32 r100
  lines w10: 9870,8125 9945,8050 10020,8125 10095,8050 10170,8125 10245,8050 10320,8125 ; 10351.25,7043.75 10595,6800 10795,6800 ; 11495,8250 12220,8250 ; 12845,6800 12595,6800 12888.75,7093.75 ; 13795,7000 13795,7400 13995,7500 13595,7600 13795,7700 13795,8100 ; 5003.67,5666.32 5003.67,5721.32 5023.67,5671.32 5003.67,5666.32 ; 5003.87,5721.16 5005,5775 5025.36,5771.79 5003.87,5721.16 ; 10245,7150 10370,7062.5 10332.5,7025 10245,7150 ; 12870,7112.5 12995,7200 12907.5,7075 12870,7112.5
  lines w20: 9895,8100 9895,7200 9995,7100 10195,7100 10295,7200 10295,8100 ; 12895,8100 12895,7300 13095,7100 13795,7100
  text ".Pcb_File_Name_No_Path" at 7000,10200 h80
  text ".Printout_Name" at 7000,10000 h90
  text "DETAIL A" at 11495,8300 h120
  text "o" at 11520,6825 h60
  text "o" at 13570,6825 h60
  text ".020 X 45  CHAMFER" at 10870,6750 h90
  text "0.05 X 45  CHAMFER" at 12920,6750 h90
  text "BOTH SIDES" at 10870,6575 h90
  text "TYP 4 PLCS" at 12920,6575 h90
  text "ENTIRE LENGTH OF" at 10870,6400 h90
  text "EDGE CONNECTOR" at 10870,6225 h90
  text "SEE DETAIL A" at 4230,5675 h75
DrillDrawing:
  text ".LEGEND" at 9850,8650 h90
  text "Drilling Details." at 9850,8500 h90

## Dimensions
8350,5700 to 8325,6000 on Mechanical4
3980,6200 to 4000,6000 on Mechanical4
4200,5980 to 4000,6000 on Mechanical4

## Text inside footprints (layer, text, board x,y; h text height)
P1: TopOverlay "A31" at 5155,6050 h48; TopOverlay "A1" at 8180,6050 h48; BottomOverlay "B1" at 8230,6050 h48; BottomOverlay "B31" at 5255,6050 h48